# EAGLE board MasterMoanna v24 (EAGLE 9.7.0)
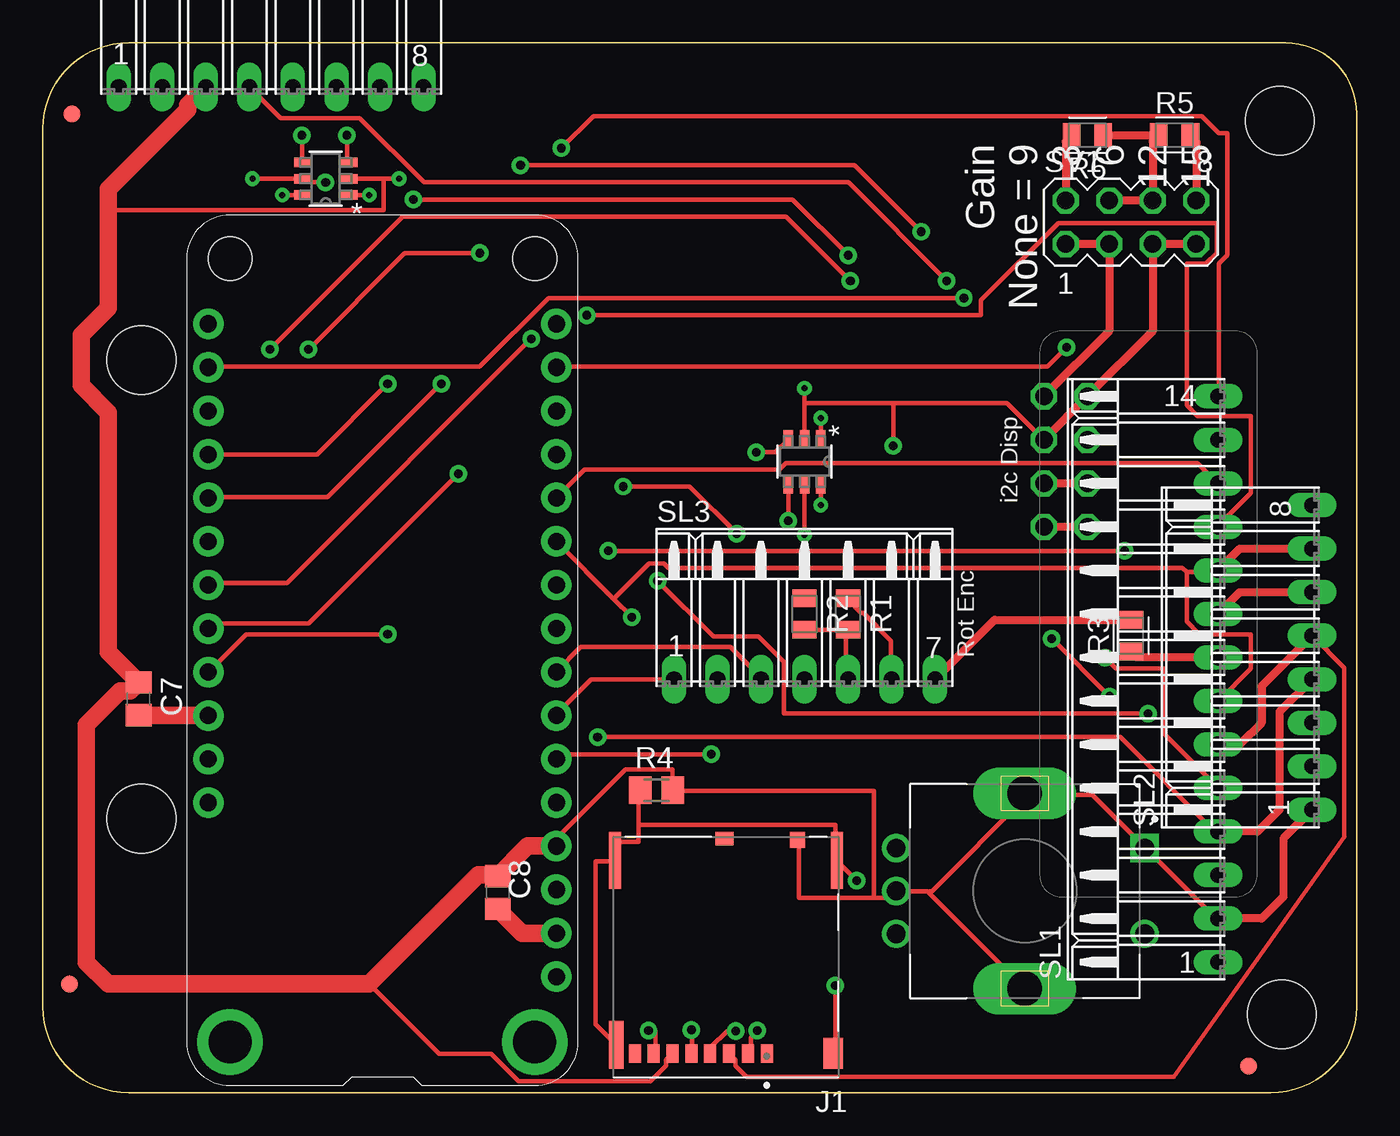
[diagram p0: board, top side]
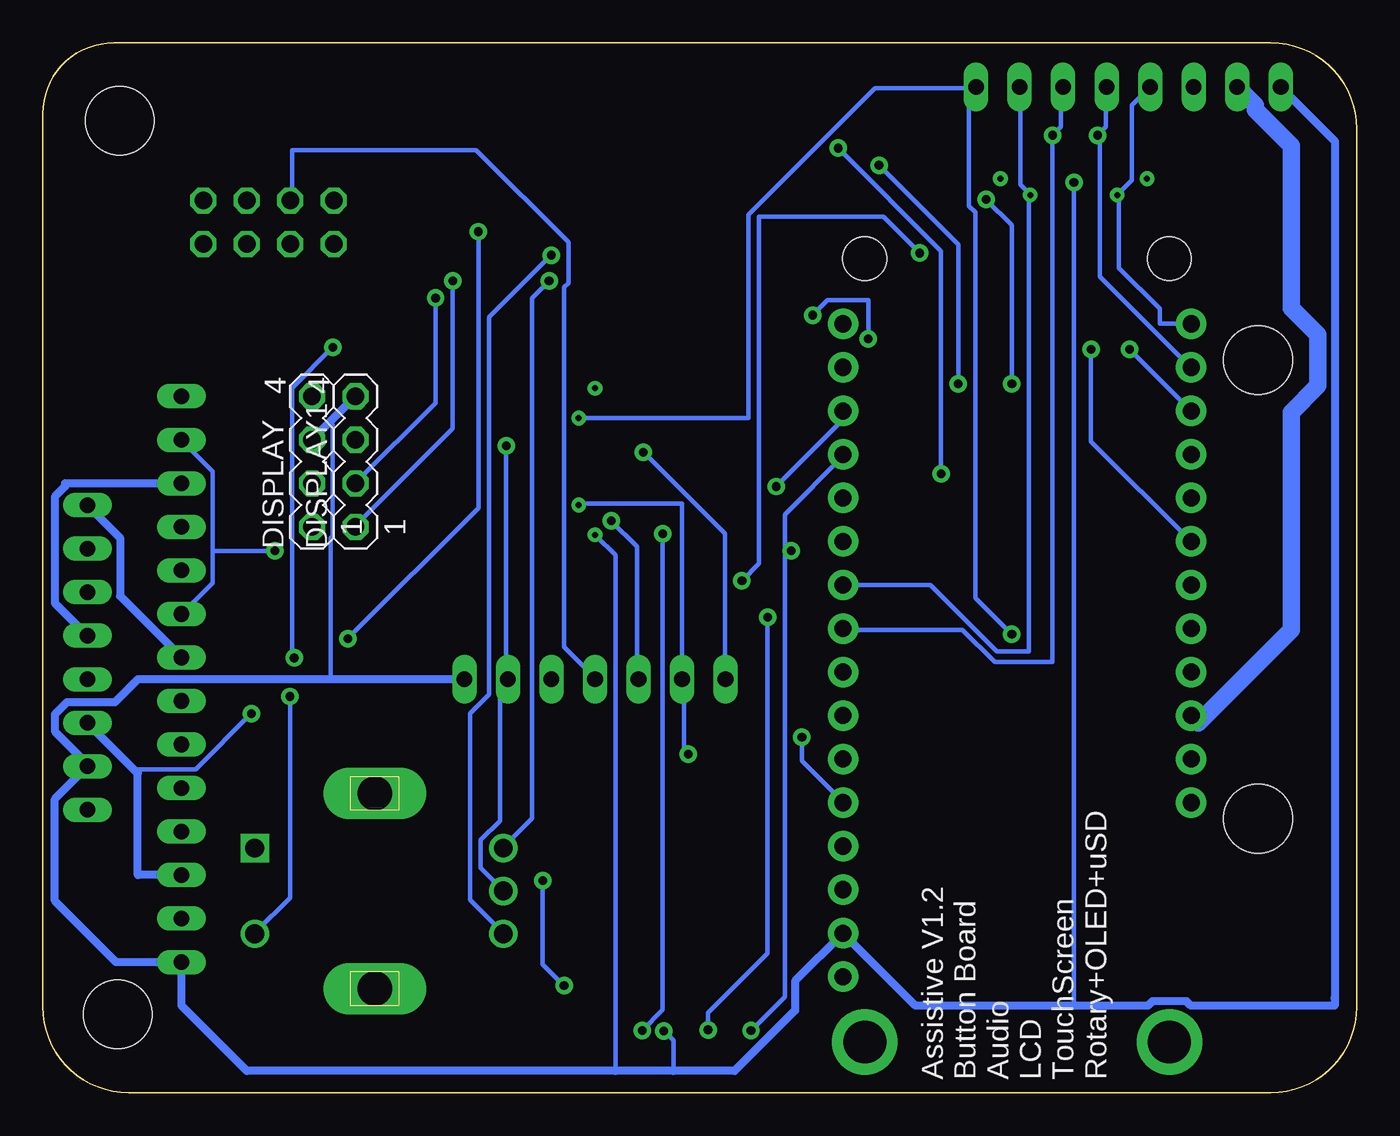
[diagram p1: board, bottom side, seen from below]

Size 76.67 x 61.27 mm. Coordinates in mm from the lower left corner, seen from the top.
Outline: 0,56.27 arc-90 5,61.27 72.54,61.27 arc-90 76.67,57.14 76.67,5 arc-90 71.67,0 5,0 arc-90 0,5 0,56.27
Copper layers (1*16): Top 0.035mm / dielectric 1.5mm / Bottom 0.035mm
Design rules "ChipRouting": minimum track width 0.16mm, minimum drill 0.35mm, track to track 10mil, track to pad 10mil, pad to pad 10mil, via to via 10mil, smd to smd 10mil, copper to edge 15mil, drill to drill 15mil, minimum pad ring 10mil, minimum via ring 10mil, stop-mask expansion 4mil, vias tented up to drill 0mil, thermal gap 10mil
Net classes: 1 USB: width 0.275 mm, clearance 0.152 mm
Holes 4 mm at 5.75,42.75 72.19,56.72 72.31,4.57 5.75,16

## Footprints (pad centres in the part's own frame; a part is rotated, then mirrored left to right if it is on the bottom)
C0805 = smd 1.3 x 1.5: 1 -0.95,0; 2 0.95,0
MA04-1 = drill 1.016 octagon: 1 1.27,1.27; 2 3.81,1.27; 3 6.35,1.27; 4 8.89,1.27
FIDUCIAL_1MM = smd 1 x 1: 1 0,0
MOLEX_503398-1892 = smd 0.7 x 1.1: 1 -2.38,5.625; 2 -1.28,5.625; 3 -0.18,5.625; 4 0.92,5.625; 5 2.02,5.625; 6 3.12,5.625; 7 4.22,5.625; 8 5.32,5.625 | smd 0.9 x 0.93: 9 -4.17,-6.84 | smd 1.05 x 0.78: 10 0.095,-6.915 | smd 1.14 x 1.83: P1 -6.26,5.61 | smd 0.86 x 2.8: P2 6.4,5.125 | smd 0.7 x 3.33: P3 -6.48,-5.64; P4 6.48,-5.64
FEATHERWING_DIM = drill 1 pad 1.778: 1 6.35,1.27; 2 8.89,1.27; 3 11.43,1.27; 4 13.97,1.27; 5 16.51,1.27; 6 19.05,1.27; 7 21.59,1.27; 8 24.13,1.27; 9 26.67,1.27; 10 29.21,1.27; 11 31.75,1.27; 12 34.29,1.27; 13 36.83,1.27; 14 39.37,1.27; 15 41.91,1.27; 16 44.45,1.27; 17 44.45,21.59; 18 41.91,21.59; 19 39.37,21.59; 20 36.83,21.59; 21 34.29,21.59; 22 31.75,21.59; 23 29.21,21.59; 24 26.67,21.59; 25 24.13,21.59; 26 21.59,21.59; 27 19.05,21.59; 28 16.51,21.59 | drill 2.5 pad 3.81: P$1 2.54,20.32; P$2 2.54,2.54 | hole 2.54: 48.26,20.32; 48.26,2.54
XDCR_PEC11R-4215F-S0024 = drill 1.1 square: 1 -2.5,7 | drill 1.1: 2 2.5,7; A -2.5,-7.5; B 2.5,-7.5; COM 0,-7.5 | drill 2 long: S1 -5.7,0; S2 5.7,0
RESC2012X65 = smd 1.031 x 1.42: 1 -0.919,0; 2 0.919,0
M0805 = smd 1.3 x 1.6: 1 -0.95,0; 2 0.95,0
14PA = drill 0.914 long: 1 -16.51,0; 2 -13.97,0; 3 -11.43,0; 4 -8.89,0; 5 -6.35,0; 6 -3.81,0; 7 -1.27,0; 8 1.27,0; 9 3.81,0; 10 6.35,0; 11 8.89,0; 12 11.43,0; 13 13.97,0; 14 16.51,0
08PA = drill 0.914 long: 1 -8.89,0; 2 -6.35,0; 3 -3.81,0; 4 -1.27,0; 5 1.27,0; 6 3.81,0; 7 6.35,0; 8 8.89,0
07PA = drill 0.914 long: 1 -7.62,0; 2 -5.08,0; 3 -2.54,0; 4 0,0; 5 2.54,0; 6 5.08,0; 7 7.62,0
MA04-2 = drill 1.016 octagon: 1 -3.81,-1.27; 2 -3.81,1.27; 3 -1.27,-1.27; 4 -1.27,1.27; 5 1.27,-1.27; 6 1.27,1.27; 7 3.81,-1.27; 8 3.81,1.27
SOT23-6_1P625X2P9_LTF = smd 1.041 x 0.559: 1 -1.333,0.95; 2 -1.333,0; 3 -1.333,-0.95; 4 1.333,-0.95; 5 1.333,0; 6 1.333,0.95

## Placement (x,y rotation side)
C7  100nf  [C0805]  5.59,22.99 270 top
C8  100nf  [C0805]  26.54,11.68 90 top
DISPLAY  MA04-1  [MA04-1]  59.69,31.75 90 bottom
DISPLAY1  MA04-1  [MA04-1]  57.15,31.75 90 bottom
FID1  FIDUCIAL  [FIDUCIAL_1MM]  1.71,57.11 0 top
FID2  FIDUCIAL  [FIDUCIAL_1MM]  1.55,6.35 0 top
FID3  FIDUCIAL  [FIDUCIAL_1MM]  70.35,1.55 0 top
J1  503398-1892  [MOLEX_503398-1892]  39.87,7.91 180 top
MS2  FEATHERWING_NODIM  [FEATHERWING_DIM]  31.25,0.42 90 top
MT1  PEC11R-4215F-S0024  [XDCR_PEC11R-4215F-S0024]  57.3,11.77 270 top
R1  DNP_100k  [RESC2012X65]  46.99,27.94 270 top
R2  1k  [RESC2012X65]  44.45,27.94 270 top
R3  0ohm  [RESC2012X65]  63.5,26.67 90 top
R4  10ohm  [M0805]  35.81,17.65 0 top
R5  100k  [RESC2012X65]  66.04,55.88 0 top
R6  100k  [RESC2012X65]  60.96,55.88 180 top
SL1  [14PA]  68.58,24.13 90 top
SL2  [08PA]  74.07,25.4 90 top
SL3  [07PA]  44.45,24.13 0 top
SL7  [08PA]  13.32,58.69 0 top
SV1  [MA04-2]  63.5,50.8 0 top
U2  SP724AHTGSOT23-6_1P625X2P9_LTF  [SOT23-6_1P625X2P9_LTF]  16.51,53.34 180 top
U3  SP724AHTGSOT23-6_1P625X2P9_LTF  [SOT23-6_1P625X2P9_LTF]  44.45,36.83 270 top

## Library data of the parts
C7 C8 = resistor; HEIGHT: 1
DISPLAY DISPLAY1 = SSIRacing
FID1-FID3 MS2 = adafruit
J1 = 503398-1892; DESCRIPTION: 9 (8 + 1) Position Card Connector Secure Digital - microSD™ Surface Mount, Right Angle Gold; DIGI-KEY_PART_NUMBER: WM11190TR-ND; MF: Molex; MP: 5033981892; PACKAGE: None; PURCHASE-URL: https://pricing.snapeda.com/search/part/5033981892/?ref=eda
MT1 = PEC11R-4215F-S0024; AVAILABILITY: In Stock; DESCRIPTION: Rotary Encoder Mechanical 24 Quadrature (Incremental) Vertical; MF: Bourns; MP: PEC11R-4215F-S0024; PACKAGE: None; PRICE: None; PURCHASE-URL: https://pricing.snapeda.com/search/part/PEC11R-4215F-S0024/?ref=eda
R1-R3 R5 R6 = Resistor; CATEGORY: Resistors; DESCRIPTION: Chip Resistor 2.00 X 1.25 X 0.65 mm body 0805(2012-METRIC) Package; PACKAGE_SIZE: 0805; PACKAGE_TYPE: SMD
R4 = resistor
SL1-SL3 SL7 = con-amp-quick; OC_FARNELL: unknown; OC_NEWARK: unknown
SV1 = con-lstb; OC_FARNELL: unknown; OC_NEWARK: unknown
U2 U3 = 2022-12-15_20-19-59_Library; COPYRIGHT: Copyright (C) 2022 Ultra Librarian. All rights reserved.; DIGI-KEY_PART_NUMBER_1: F2863TR-ND; DIGI-KEY_PART_NUMBER_2: F2863CT-ND; DIGI-KEY_PART_NUMBER_3: F2863DKR-ND; MANUFACTURER_PART_NUMBER: SP724AHTG; MFR_NAME: Littelfuse Inc

## Nets
!INT: MS2.10 SL7.7 U2.1
!RESET: MS2.9 SL7.6 U2.3
+3V3: C8.1 DISPLAY1.4 DISPLAY.3 J1.4 MS2.2 R3.2 SL1.1 SL2.2 SL3.7 SL7.1 SV1.1 SV1.3 U2.5 U3.5
+5: C7.2 MS2.26 SL7.2
BLK: MS2.6 SL3.2 U3.6
BUTTON: MS2.21 MT1.2
DC: MS2.15 SL1.5
DIN: MS2.8 SL3.3 U3.4
GAIN: R5.1 R6.1 SL3.4 SV1.4 SV1.6
GND: C7.1 C8.2 DISPLAY1.3 DISPLAY.4 J1.6 J1.9 MS2.4 MT1.1 MT1.COM MT1.S1 MT1.S2 R1.1 R4.2 SL1.2 SL2.1 SL3.6 SL7.3 SV1.5 SV1.7 U2.2 U3.2
LCR: MS2.7 SL3.1 U3.3
LED: R3.1 SL1.8 SL2.8
MISO: J1.7 MS2.13 SL1.9 SL1.13 SL2.6
MOSI: J1.3 MS2.12 SL1.6 SL1.12 SL2.5
N$1: R5.2 SV1.8
N$2: R6.2 SV1.2
NEO_PIXEL_PIN: MS2.25 SL7.8 U3.1
RESET_LCD: MS2.5 SL1.4 SL2.4
ROT_A: MS2.19 MT1.A
ROT_B: MS2.20 MT1.B
SCL: DISPLAY1.2 DISPLAY.2 MS2.18 SL7.5 U2.4
SCLK: J1.5 MS2.11 SL1.7 SL1.10 SL2.7
SD: R1.2 R2.2 SL3.5
SDA: DISPLAY1.1 DISPLAY.1 MS2.17 SL7.4 U2.6
SHIELD: J1.P1 J1.P2 J1.P3 J1.P4 R4.1
SOUND_ENABLE: R2.1
TOUCH_CS: MS2.23 SL1.11
TOUCH_INT: MS2.24 SL1.14
TTF_CS: MS2.22 SL1.3 SL2.3
U_SD_CS: J1.2 MS2.14
VBAT: MS2.28

## Tracks (layer width: path | path; a pad name or v marks a point on that pad's centre or on a via)
!INT  (via drill 0.35)
  Top 0.254: U2.1 v19.05,52.39
  Bottom 0.25: SL7.7 19.62,58.62 19.62,53 19.12,52.5 v19.05,52.39 19.12,52.38 19.12,25.75 21,25.75 24.88,29.62 29.88,29.62 MS2.10
!RESET  (via drill 0.51)
  Top 0.25: v17.75,55.88 17.75,54.38 U2.3
  Bottom 0.25: SL7.6 17.25,58.62 17.25,56.38 v17.75,55.88 17.75,25.12 21.12,25.12 23,27 29.88,27 MS2.9
+3V3  (via drill 0.35, 0.51)
  Top 0.25: J1.4 39,2.38 39,2.67 39.92,3.6 v40.43,3.6 | v16.5,53.12 15.38,53.12 15.25,53.25 U2.5
  Top 0.254: U2.5 v12.23,53.34 | U3.5 v44.45,32.55
  Top 0.457: SV1.1 SV1.3 62.23,44.45 DISPLAY1.4 | SL3.7 55.53,27.59 R3.2
  Top 1.016: C8.1 27.97,9.31 MS2.2
  Bottom 0.25: 59.88,24.13 59.88,32.38 59.75,32.5 59.75,39 59.91,39.16 | 16.5,5.08 v16.5,53.12 | 43.25,1.27 43.25,31.38 44.38,32.5 v44.45,32.55 | 39.88,1.27 39.88,3.04 v40.43,3.6
  Bottom 0.457: DISPLAY1.4 59.91,39.16 DISPLAY.3 | SL7.1 1.27,55.52 1.27,5.54 1.28,5.53 1.28,5.08 9.67,5.08 9.94,5.35 11.91,5.35 12.18,5.08 16.5,5.08 25.75,5.08 MS2.2 32.77,6.52 32.77,4.8 36.3,1.27 39.88,1.27 43.25,1.27 64.77,1.27 68.58,5.08 SL1.1 72.39,7.62 75.97,11.2 75.97,17.14 SL2.2 74.07,19.19 75.97,21.1 75.97,22.08 75.27,22.78 72.47,22.78 71.12,24.13 59.88,24.13 SL3.7
+5
  Top 1.016: MS2.26 5.62,22.01 C7.2
  Bottom 1.016: SL7.2 5.91,57.62 5.91,57.37 3.81,55.27 3.81,45.79 2.26,44.24 2.26,41.26 3.81,39.71 3.81,27.02 9.24,21.59 MS2.26
BLK  (via drill 0.35, 0.51)
  Top 0.25: v39,19.75 30.25,19.75 30,19.5 MS2.6
  Top 0.254: U3.6 v45.4,34.29
  Bottom 0.25: v45.4,34.29 45.38,34.38 39.38,34.38 39.38,24.25 SL3.2 39.25,24.12 39.25,20 v39,19.75
BUTTON  (via drill 0.51)
  Top 0.25: v58.88,26.5 v62.25,23.12 | v51.25,50.25 47.38,54.12 v27.88,54.12 | v23.25,41.38 16.62,34.75 9.75,34.75 MS2.21
  Bottom 0.25: v62.25,23.12 62.25,11.38 64.25,9.38 MT1.2 | v58.88,26.5 51.25,34.12 v51.25,50.25 | v27.88,54.12 23.25,49.5 v23.25,41.38
DC  (via drill 0.51)
  Top 0.25: v62,25.38 62.62,24.75 65.5,24.75 65.5,20.88 68.5,17.88 SL1.5 | v59.75,43.5 58.62,42.38 30,42.38 MS2.15
  Bottom 0.25: v62,25.38 62.12,25.5 62.12,41.12 v59.75,43.5
DIN  (via drill 0.51)
  Top 0.25: v43.5,33.38 U3.4 | MS2.8 30,24.62 31.38,26 40.12,26 41.88,24.25 SL3.3
  Bottom 0.25: v43.5,33.38 42,31.88 42,24.25 SL3.3
GAIN
  Top 0.457: R6.1 R5.1 64.77,55.53 SV1.6 SV1.4
  Bottom 0.25: SL3.4 44.5,24.25 46.25,26 46.25,47 46,47.25 46,49.62 51.38,55 62.12,55 62.12,52.12 SV1.4
GND  (via drill 0.35, 0.51)
  Top 0.25: SL1.2 68.38,10.25 64.38,14.25 MT1.1 64.25,14.38 61.25,17.38 57.38,17.38 MT1.S1 57.38,17.25 51.88,11.75 51.75,11.75 51.69,11.69 | 49.62,40.25 56.25,40.25 58.25,38.25 DISPLAY1.3 | 49.62,40.25 44.45,40.25 | R1.1 47,28.75 47.75,28 47.88,28 49.5,26.38 49.5,24.25 SL3.6 | 48.5,11.38 49.38,11.38 49.75,11.75 MT1.COM 49.88,11.75 51.62,11.75 51.69,11.69 | 48.5,11.38 44.12,11.38 44.12,14.62 J1.9 | 36.75,2.25 J1.6 36.38,1.91 36.38,1.58 35.48,0.68 27.76,0.68 26.15,2.28 23.12,2.28 19.05,6.35 | v49.62,37.75 49.62,40.25 | 51.69,11.69 57.25,6.12 MT1.S2 | MS2.4 30,14.88 34,18.88 36.75,18.88 36.75,17.75 R4.2 36.88,17.62 48.5,17.62 48.5,11.38 | 19.88,53.34 19.88,51.5 3.81,51.5
  Top 0.254: U2.2 19.88,53.34 v20.79,53.34 | U3.2 44.45,40.25 v44.45,41.11
  Top 0.457: SL2.1 72.39,14.83 72.39,11.43 71.12,10.16 SL1.2 | SV1.7 SV1.5 64.77,44.45 DISPLAY.4 DISPLAY1.3
  Top 1.016: SL7.3 8.45,57.62 8.45,57.37 3.81,52.73 3.81,51.5 3.81,45.79 2.23,44.21 2.23,41.29 3.81,39.71 3.81,25.71 C7.1 5.1,23.45 4.52,23.45 2.54,21.47 2.54,7.62 3.81,6.35 19.05,6.35 25.4,12.7 26.48,12.7 C8.2 28.3,14.39 MS2.4
  Bottom 0.25: MT1.COM 49.88,11.88 51.12,13.12 51.12,14.75 50,15.88 50,23.75 49.62,24.12 SL3.6 49.62,24.25 v49.62,37.75
LCR  (via drill 0.51)
  Top 0.25: v41.62,37.38 42.75,37.38 43.5,38.12 U3.3 | MS2.7 30,22.12 32,24.12 36.75,24.12 SL3.1
  Bottom 0.25: v41.62,37.38 36.88,32.62 36.88,24.25 SL3.1
LED
  Top 0.457: SL1.8 63.85,25.4 R3.1
  Bottom 0.457: SL2.8 72.16,32.38 72.16,28.98 SL1.8
MISO  (via drill 0.51)
  Top 0.25: v35.35,3.62 35.75,3.62 35.75,2.38 J1.7 | v33,31.62 v63.12,31.62
  Top 0.457: SL1.9 69.85,29.21 SL2.6
  Bottom 0.25: 66.75,31.62 66.75,29.75 68.5,28 SL1.9 | 66.75,31.62 66.75,36.25 68.5,38 SL1.13 | v35.35,3.62 33.38,5.6 33.38,31.62 | 33.38,31.62 33.38,33.75 30,37.12 MS2.13 | v63.12,31.62 66.75,31.62 | 33.38,31.62 v33,31.62
MOSI
  Top 0.25: MS2.12 30,34.75 31.62,36.38 43,36.38 43.38,36.75 67.38,36.75 68.5,35.62 SL1.12 | J1.3 40.42,1.91 40.42,1.58 41.05,0.94 65.99,0.94 75.95,14.93 75.95,24.79 SL2.5
  Top 0.457: SL2.5 71.12,23.72 71.12,21.59 69.85,20.32 SL1.6
  Bottom 0.457: SL1.12 75.39,35.56 75.39,35.37 75.97,34.78 75.97,28.57 SL2.5
N$1
  Top 0.457: R5.2 67.31,55.53 SV1.8
N$2
  Top 0.457: R6.2 59.69,55.53 SV1.2
NEO_PIXEL_PIN  (via drill 0.35, 0.51)
  Top 0.25: v20.12,26.75 11.88,26.75 9.75,24.62 MS2.25
  Top 0.254: U3.1 v45.4,39.37
  Bottom 0.25: 22.62,58.62 22.25,58.62 SL7.8 22.62,58.62 | 22.62,58.62 28.12,58.62 35.5,51.25 35.5,39.38 45.38,39.38 v45.4,39.37 | v20.12,26.75 22.25,28.88 22.25,51.38 22.62,51.75 22.62,58.62
RESET_LCD  (via drill 0.51)
  Top 0.25: v32.38,20.75 62.88,20.75 68.38,15.25 SL1.4
  Top 0.457: SL2.4 72.16,22.23 72.16,16.51 70.89,15.24 SL1.4
  Bottom 0.25: v32.38,20.75 32.38,19.38 30,17 MS2.5
ROT_A  (via drill 0.51)
  Top 0.25: v47.12,47.38 43.38,51.12 21,51.12 v13.25,43.38
  Bottom 0.25: v47.12,47.38 48.12,46.38 48.12,16 49.75,14.38 MT1.A | v13.25,43.38 9.75,39.88 MS2.19
ROT_B  (via drill 0.51)
  Top 0.25: v47,48.88 43.75,52.12 v21.62,52.12 | v20.12,41.38 16,37.25 9.75,37.25 MS2.20
  Bottom 0.25: v47,48.88 50.62,45.25 50.62,23.25 51.75,22.12 51.75,11.25 49.88,9.38 MT1.B | v21.62,52.12 20.12,50.62 v20.12,41.38
SCL  (via drill 0.51)
  Top 0.25: v15.12,55.88 15.12,54.38 U2.4 | v53.75,46.38 29.5,46.38 25.5,42.38 9.75,42.38 MS2.18
  Top 0.457: DISPLAY.2 DISPLAY1.2
  Bottom 0.25: SL7.5 14.62,58.62 14.62,56.38 v15.12,55.88 15,55.88 15,47.62 9.75,42.38 MS2.18 | v53.75,46.38 53.75,40.25 58.38,35.62 DISPLAY1.2
SCLK  (via drill 0.51)
  Top 0.25: 66.75,30.38 66.75,27.5 67.5,26.75 70.5,26.75 70.5,24.75 68.62,22.88 SL1.7 | 66.75,30.38 68.38,30.38 SL1.10 | 33.31,28.81 30,32.12 MS2.11 | 33.31,28.81 v34.38,27.75 | J1.5 37.88,2.38 37.88,3.64 v37.85,3.66 | 66.75,30.38 66.5,30.62 36.5,30.62 36.25,30.88 35.38,30.88 33.31,28.81
  Top 0.457: SL1.10 69.85,31.75 SL2.7
  Bottom 0.25: v34.38,27.75 34.38,8.14 37.85,4.66 v37.85,3.66
SD
  Top 0.25: R2.2 44.5,27 46.88,27 R1.2 46.88,26.88 46.88,24.25 SL3.5
SDA  (via drill 0.35, 0.51)
  Top 0.25: v52.75,47.38 47,53.12 22.25,53.12 18.5,56.88 13.88,56.88 12.12,58.62 SL7.4
  Top 0.254: U2.6 v13.97,52.39
  Top 0.457: DISPLAY.1 DISPLAY1.1
  Bottom 0.25: SL7.4 12.12,58.62 13.12,57.62 13.12,53.25 13.88,52.5 v13.97,52.39 13.88,52.38 13.88,48.12 11.5,45.75 11.5,44.88 9.75,44.88 MS2.17 | v52.75,47.38 52.75,38.75 58.38,33.12 DISPLAY1.1
SHIELD  (via drill 0.51)
  Top 0.25: v46.25,6.25 46.25,2.38 J1.P1 | v47.5,12.38 46.38,13.5 J1.P3 46.25,13.62 46.25,15.62 34.75,15.62 | 34.75,15.62 34.75,14.62 33.75,14.62 33.5,14.38 33.5,13.62 J1.P4 33.38,13.5 32.25,13.5 32.25,4 33.38,2.88 J1.P2 | 34.75,15.62 34.75,17.62 R4.1
  Bottom 0.25: v46.25,6.25 47.5,7.5 v47.5,12.38
TOUCH_CS  (via drill 0.51)
  Top 0.25: v31.75,45.38 54.75,45.38 54.75,46.25 59.25,50.75 68.5,50.75 68.5,49 67.88,48.38 66.75,48.38 66.75,40.12 67.38,39.5 70.5,39.5 70.5,35 68.62,33.12 SL1.11 | v28.5,44 14.25,29.75 9.75,29.75 MS2.23
  Bottom 0.25: v31.75,45.38 30.88,46.25 28.5,46.25 v28.5,44
TOUCH_INT  (via drill 0.51)
  Top 0.25: v30.25,55.12 32.12,57 67.62,57 68.62,56 69.12,56 69.12,48.88 68.62,48.38 68.62,40.75 SL1.14 | v24.25,36.12 15.5,27.38 10,27.38 9.75,27.12 MS2.24
  Bottom 0.25: v30.25,55.12 24.25,49.12 v24.25,36.12
TTF_CS  (via drill 0.51)
  Top 0.25: v15.5,43.38 21.12,49 v25.5,49 | v35.88,29.88 39.12,26.62 41.75,26.62 43.25,25.12 43.25,22.12 v64.5,22.12
  Bottom 0.25: v15.5,43.38 15.5,38 9.75,32.25 MS2.22 | v25.5,49 27.62,51.12 34.88,51.12 34.88,30.88 v35.88,29.88 | v64.5,22.12 67.75,18.88 71.12,18.88 71.24,18.76
  Bottom 0.457: SL1.3 71.12,12.7 71.12,18.64 71.24,18.76 SL2.3
U_SD_CS  (via drill 0.51)
  Top 0.25: v40.5,32.62 37.75,35.38 v33.88,35.38 | v41.7,3.62 41.31,3.24 41.31,2.45 J1.2
  Bottom 0.25: v33.88,35.38 30,39.25 30,39.75 MS2.14 | v40.5,32.62 40.5,4.82 v41.7,3.62

## Text on the board
tNames: Gain / None = 9 / 3 / 6 / 12 / 15 | i2c Disp | Rot Enc
bNames: Assistive V1.2 / Button Board / Audio / LCD / TouchScreen / Rotary+OLED+uSD
silk_bottom: Button Board | TouchScreen | LCD | i2s AdaFruit Class D